# Altium PCB PCB1.pcbdoc
Units mil, origin at the board's own origin, x right, y up, seen from the top; angles counter-clockwise.
Board outline 4745.27 x 1986.06 mil, 2 copper layers (Top Layer, Bottom Layer); 34 components, 46 nets, 162 pads, 58 vias.
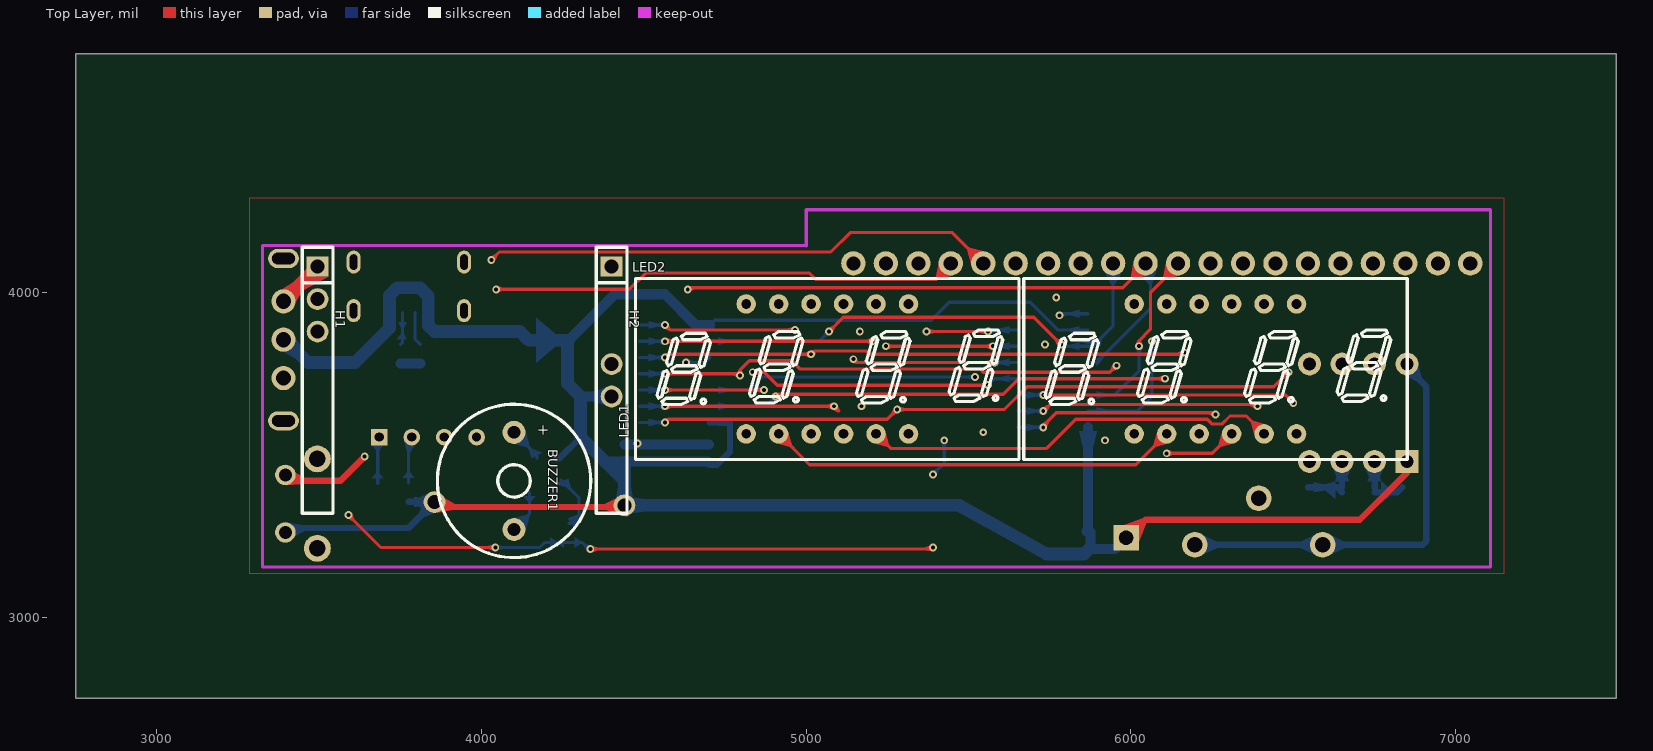
[diagram p0: Top Layer view]
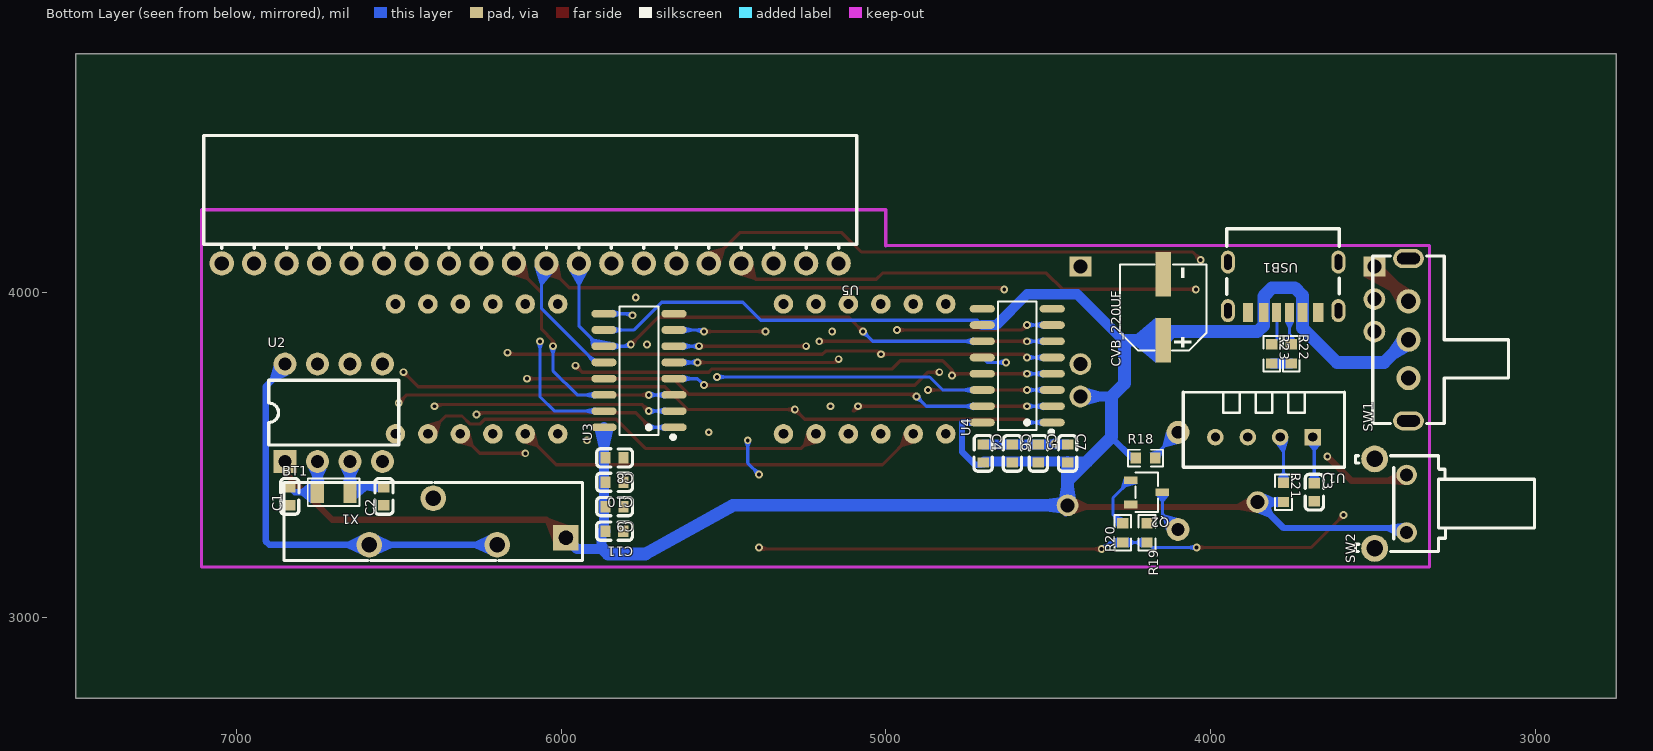
[diagram p1: Bottom Layer view, seen from below]

## Layer stack, top to bottom
Top Layer: signal copper (thickness not stored)
Dielectric: dielectric 12.6, FR-4, Dk 4.8
Bottom Layer: signal copper (thickness not stored)

## Board outline
7495.27,2750 2750,2750 2750,4736.06 7495.27,4736.06

## Components (designator, comment, footprint, x,y, rotation, side; value= is the part's Value field where it differs from the comment)
BT1 "BS-05-A1BJ001" BAT-TH_BS-05-A1BJ001 6393.81,3295 r180 bottom
BUZZER1 "FMB12A24" BUZ-TH_BD12.0-P7.60-D0.6-FD 4100.27,3420 r270 top
C1 "CL10C200JB8NNNC" C0603 6835.52,3372.69 r90 bottom
C2 "CL10C200JB8NNNC" C0603 6545.52,3372.69 r90 bottom
C3 "CL10B104KB8NNNC" C0603 3680.27,3385 r270 bottom
C4 "CL10B104KB8NNNC" C0603 4700.27,3504.39 r270 bottom
C5 "CL10B104KB8NNNC" C0603 4530.27,3504.39 r270 bottom
C6 "CL10A106MA8NRNC" C0603 4610.27,3504.39 r270 bottom
C7 "CL10A106MA8NRNC" C0603 4440.27,3504.39 r270 bottom
C8 "CL10B104KB8NNNC" C0603 5835.61,3490.98 r0 bottom
C9 "CL10B104KB8NNNC" C0603 5835.61,3340.98 r0 bottom
C10 "CL10A106MA8NRNC" C0603 5835.61,3415.98 r0 bottom
C11 "CL10A106MA8NRNC" C0603 5835.88,3265.21 r0 bottom
CVB_220UF "RX220UF16V90RV0106" CAP-SMD_BD6.3-L6.6-W6.6-FD-2 4145.27,3955 r90 bottom
H1 "PM2.54-1*8" HDR-TH_8P-P2.54-V-F#1 3495.27,3730 r270 top
H2 "PM2.54-1*8" HDR-TH_8P-P2.54-V-F#2 4400.78,3730 r270 top
LED1 "FJ3461AH" LED-SEG-TH_12P-L30.0-W14.0-P2.54-S10.16-BL 6260.27,3765 r0 top
LED2 "FJ3461AH" LED-SEG-TH_12P-L30.0-W14.0-P2.54-S10.16-BL 5065.27,3765 r0 top
Q2 "SS8050_C177739" SOT-23-3_L2.9-W1.6-P1.90-LS2.8-BR 4196.89,3385 r0 bottom
R18 "RTT03100JTP" R0603 4200.27,3490 r180 bottom
R19 "0603WAF1002T5E" R0603 4195.27,3260 r90 bottom
R20 "0603WAF4701T5E" R0603 4270.27,3260 r90 bottom
R21 "ERJ3GEYJ472V" R0603 3775.27,3385 r270 bottom
R22 "0603WAF5101T5E" R0603 3751.43,3811.16 r270 bottom
R23 "0603WAF5101T5E" R0603 3811.43,3811.16 r270 bottom
SW1 "SK12F14G5" SW-TH_SK12F14G5 3390.27,3855 r90 bottom
SW2 "KH-6X6X10H-ZJ" SW-TH_KH-6X6X10H-ZJ 3445.27,3350 r90 bottom
U1 "DHT11" SENSOR-TH_DHT11 3835.27,3555 r0 bottom
U2 "DS1302N" DIP-8_L9.7-W6.4-P2.54-LS7.6-BL 6700.27,3630 r180 bottom
U3 "SN74HC595DR" SOIC-16_L9.9-W3.9-P1.27-LS6.0-BL 5760.27,3760 r90 bottom
U4 "SN74HC595DR" SOIC-16_L9.9-W3.9-P1.27-LS6.0-BL 4595.27,3775 r90 bottom
U5 "PM254-1-20-W-8.5" HDR-TH_20P-P2.54-H-F-W10.0-N 6095.27,4090 r0 bottom
USB1 "TYPE-C-31-M-17" USB-C-SMD_10P-P1.00-L6.8-W8.9 3776.43,4016.16 r0 bottom
X1 "FC-135 32.7680KA-A" OSC-SMD_L3.2-W1.5 6700.52,3385.25 r0 bottom

## Footprints (in the part's own frame and the unit in brackets; to place one, negate y for a bottom-side part, rotate by r counter-clockwise, add the part's x,y. Pads: shape width x height; smd on the part's side, far side on the other; paste and mask are expansions set on the pad)
BAT-TH_BS-05-A1BJ001 [mm]
  round 2 hole 1.2: 1(-5,-1.825) 1(5,-1.825) 2(0,1.825)
  silkscreen extent -11.68,-3.05 11.68,3.05
BUZ-TH_BD12.0-P7.60-D0.6-FD [mm]
  round 1.8 hole 1: 1(-3.8,0) 2(3.8,0)
  silkscreen extent -6,-6 6,6
C0603 [mm]
  rect 0.8x0.9 smd: 1(-0.7,0) 2(0.7,0)
  silkscreen extent -1.41,-0.71 1.39,0.72
CAP-SMD_BD6.3-L6.6-W6.6-FD-2 [mm]
  rect 3.5x1.2 smd: 1(-2.58,0) 2(2.58,0)
  silkscreen extent -3.4,-3.38 3.36,3.38
DIP-8_L9.7-W6.4-P2.54-LS7.6-BL [mm]
  rect 1.8x1.8 hole 1: 1(-3.81,-3.81)
  round 1.8 hole 1: 2(-1.27,-3.81) 3(1.27,-3.81) 4(3.81,-3.81) 5(3.81,3.81) 6(1.27,3.81) 7(-1.27,3.81) 8(-3.81,3.81)
  silkscreen extent -5.08,-2.53 5.08,2.53
HDR-TH_8P-P2.54-V-F#1 [mm]
  rect 1.575x1.7 hole 1.1: 1(-8.89,0)
  round 1.7 hole 1.1: 2(-6.35,0) 3(-3.81,0)
  silkscreen extent -10.4,-1.2 10.4,1.2
HDR-TH_8P-P2.54-V-F#2 [mm]
  rect 1.575x1.7 hole 1.1: 1(-8.89,0)
  round 1.7 hole 1.1: 4(-1.27,0) 5(1.27,0)
  silkscreen extent -10.4,-1.2 10.4,1.2
HDR-TH_20P-P2.54-H-F-W10.0-N [mm]
  round 1.9 hole 1.1: 1(-24.13,0) 2(-21.59,0) 3(-19.05,0) 4(-16.51,0) 5(-13.97,0) 6(-11.43,0) 7(-8.89,0) 8(-6.35,0) 9(-3.81,0) 10(-1.27,0) 11(1.27,0) 12(3.81,0) 13(6.35,0) 14(8.89,0) 15(11.43,0) 16(13.97,0) 17(16.51,0) 18(19.05,0) 19(21.59,0) 20(24.13,0)
  silkscreen extent -25.54,-10 25.54,-1.18
LED-SEG-TH_12P-L30.0-W14.0-P2.54-S10.16-BL [mil]
  round 60 hole 30: 1(-250,-200) 2(-150,-200) 3(-50,-200) 4(50,-200) 5(150,-200) 6(250,-200) 7(250,200) 8(150,200) 9(50,200) 10(-50,200) 11(-150,200) 12(-250,200)
  silkscreen extent -591,-279 591,279
OSC-SMD_L3.2-W1.5 [mm]
  rect 1.05x1.7 smd: 1(-1.275,0) 2(1.275,0)
  silkscreen extent -2.03,-1.08 2.03,1.08
R0603 [mil]
  rect 31.75x34.02 smd: 1(-29.66,0) 2(29.66,0)
  silkscreen extent -55,-26 55,26
SENSOR-TH_DHT11 [mil]
  rect 51x51 hole 28: 1(-150,0)
  round 51 hole 28: 2(-50,0) 3(50,0) 4(150,0)
  silkscreen extent -248,-138 248,93
SOIC-16_L9.9-W3.9-P1.27-LS6.0-BL [mil]
  oval 23.7x77.6 smd: 1(-175,-107.7) 2(-125,-107.7) 3(-75,-107.7) 4(-25,-107.7) 5(25,-107.7) 6(75,-107.7) 7(125,-107.7) 8(175,-107.7) 9(175,107.7) 10(125,107.7) 11(75,107.7) 12(25,107.7) 13(-25,107.7) 14(-75,107.7) 15(-125,107.7) 16(-175,107.7)
  silkscreen extent -211,-111 198,60
SOT-23-3_L2.9-W1.6-P1.90-LS2.8-BR [mm]
  rect 1.07x0.6 smd: 1(1.235,-0.95) 2(1.235,0.95) 3(-1.235,0)
  silkscreen extent -0.88,-1.54 0.88,1.54
SW-TH_KH-6X6X10H-ZJ [mm]
  round 1.6 hole 1: 1(-2.25,-1.25) 2(2.25,-1.25)
  round 2.1 hole 1.3 copper offset 0,0: 3(-3.5,1.25) 4(3.5,1.25)
  silkscreen extent -3.75,-11.25 3.75,2.75
SW-TH_SK12F14G5 [mm]
  round 1.9 hole 1.2: 1(-3,0) 2(0,0) 3(3,0)
  oval 1.5x2.4 hole 0.9 slot 1.8 at 90 deg: 4(6.35,0) 5(-6.35,0)
  silkscreen extent -6.55,-7.82 6.55,2.8
USB-C-SMD_10P-P1.00-L6.8-W8.9 [mm]
  oval 1.1x1.8 hole 0.6 slot 1.2 at 90 deg: 0(-4.32,-1.975) 0(-4.32,1.825) 0(4.32,-1.975) 0(4.32,1.825)
  rect 0.8x1.5 smd: 1(-2.75,1.975) 6(2.75,1.975)
  rect 0.76x1.5 smd: 2(-1.52,1.975) 5(1.52,1.975)
  rect 0.7x1.5 smd: 3(-0.5,1.975) 4(0.5,1.975)
  silkscreen extent -4.41,-4.58 4.41,0.56

## Free pads (board coordinates)
  round 66.93 hole 43.31: 4(3855.27,3355) 4(4440.27,3345)
  rect 78.74x78.74 hole 43.31 slot 43.81 at 0 deg: 4(5985.27,3245)

## Via types
v1: diameter 24.02, hole 12.01, Top Layer to Bottom Layer, 58 vias

## Nets (pads, with @x,y where several pads share a name; then routed paths per layer and width w, separated by ;. In a path a pad name is that pad's centre, name@x,y a point inside that pad or via, vN(x,y) a via of type N, cw(c..) or ccw(c..) an arc to the next point about the centre after c; other vN are vias at no path point)
3V3: H2.1 U5.18 | length 2499.2
  Inner2 w10: H2.1 4925.27,4080 4980.27,4025 6785.27,4025 U5.18@6850.27,4090
5V: H1.1 SW1.3 | length 150.4
  Top Layer w39.37: SW1.3 3390.27,3975 H1.1
$1N1104: BUZZER1.1 R18.2 | length 108.7
  Bottom Layer w10: BUZZER1.1 4170.61,3499.26 R18.2
$1N1105: Q2.1 R20.2 | length 170.6
  Bottom Layer w10: Q2.1 4300.27,3367.64 4300.27,3315 4274.93,3289.66 R20.2
$1N1107: BUZZER1.2 Q2.3 | length 134.5
  Bottom Layer w10: BUZZER1.2 4148.26,3318.38 Q2.3
$1N1509: U5.13
$1N2058: C1.2 U2.2 X1.2 | length 171.8
  Bottom Layer w19.68: U2.2 6750.72,3479.55 X1.2@6750.72,3399.35 ; X1.2 6820.52,3385.25 C1.2
$1N2064: C2.2 U2.3 X1.1 | length 190.8
  Bottom Layer w19.68: C2.2 6635.32,3400.25 X1.1 ; X1.1@6650.27,3400.2 U2.3
$1N3028: C3.1 U1.1 | length 144.5
  Bottom Layer w10: C3.1 3680.27,3550 U1.1
$1N5258: U3.9 U4.14 | length 1269.4
  Inner1 w10: v1(5520.27,3740) 5590.27,3740 v1(5780.27,3930)
  Bottom Layer w10: U4.14 4825.27,3700 4865.27,3740 v1(5520.27,3740) v1@5525.27,3735 ; v1(5780.27,3930) 5785.27,3935 U3.9
$1N8704: R22.1 USB1.3 | length 99.8
  Bottom Layer w10: R22.1 3756.73,3846.12 USB1.3
$1N8705: R23.1 USB1.4 | length 104.6
  Bottom Layer w10: USB1.4 3795.27,3937.55 3795.27,3856.98 R23.1
A0: LED1.12 U3.15 | length 523.7
  Inner1 w10: LED1.12 6010.27,3905 v1(6065.27,3850)
  Bottom Layer w10: U3.15 6020.27,3635 6065.27,3680 v1(6065.27,3850)
A1: LED1.9 U3.1 | length 992.1
  Top Layer w10: v1(5730.27,3585) 5730.27,3590 5770.27,3630 6255.27,3630 v1(6260.27,3625)
  Inner1 w10: v1(6260.27,3625) 6260.27,3915 LED1.9
  Bottom Layer w10: U3.1 v1(5730.27,3585)
A2: LED1.8 U3.2 | length 1071.3
  Top Layer w10: v1(5730.27,3635) 5750.27,3655 6385.27,3655 v1(6390.27,3650)
  Inner1 w10: v1(6390.27,3650) 6410.27,3670 LED1.8
  Bottom Layer w10: U3.2 v1(5730.27,3635)
A3: LED1.6 U3.3 | length 957.2
  Top Layer w10: v1(5730.27,3685) 6475.27,3685 v1(6500.27,3660)
  Inner1 w10: v1(6500.27,3660) 6510.27,3650 LED1.6
  Bottom Layer w10: U3.3 v1(5730.27,3685)
A4: LED2.12 U3.4 | length 1041.3
  Top Layer w10: v1@4840.27,3755 4870.27,3755 4910.27,3715 v1(5560.27,3715)
  Inner1 w10: LED2.12 4835.27,3945 v1(4835.27,3755)
  Bottom Layer w10: 5570.27,3725 5580.27,3735 U3.4
A5: LED2.9 U3.5 | length 693.9
  Top Layer w10: v1(5145.27,3795) 5155.27,3785 v1(5580.27,3785)
  Inner1 w10: LED2.9 5115.27,3825 v1(5145.27,3795)
  Bottom Layer w10: v1(5580.27,3785) U3.5
A6: LED2.8 U3.6 | length 549.7
  Top Layer w10: v1(5245.27,3835) v1(5575.27,3835)
  Inner1 w10: LED2.8 5245.27,3935 v1(5245.27,3835)
  Bottom Layer w10: v1(5575.27,3835) U3.6
A7: LED2.6 U3.7 | length 622.2
  Top Layer w10: v1(5370.27,3880) v1(5560.27,3880)
  Inner1 w10: LED2.6 5370.27,3620 v1(5370.27,3880)
  Bottom Layer w10: v1(5560.27,3880) 5565.27,3885 U3.7
B0: LED1.11 LED2.11 U4.15 | length 1958.7
  Top Layer w10: v1(4905.27,3680) 4912.28,3687.01 5607.28,3687.01 5655.27,3735 v1(6105.27,3735)
  Inner1 w10: v1(4905.27,3680) 4915.27,3690 LED2.11 ; v1(6105.27,3735) 6110.27,3740 LED1.11
  Bottom Layer w10: U4.15 4875.27,3650 v1(4905.27,3680)
B1: LED1.7 LED2.7 U4.1 | length 2621.8
  Top Layer w10: v1(4565.27,3600) 4575.27,3610 5250.27,3610 v1(5280.27,3640) 5610.27,3640 5680.27,3710 6440.27,3710 v1(6485.27,3755)
  Inner1 w10: v1(5280.27,3640) 5280.27,3930 LED2.7 ; v1(6485.27,3755) 6485.27,3845 6510.27,3870 LED1.7
  Bottom Layer w10: U4.1 v1(4565.27,3600)
B2: LED1.4 LED2.4 U4.2 | length 1961
  Top Layer w10: v1(4565.27,3650) v1(5085.27,3650) 5100.27,3635 ; v1(6110.27,3505) 6250.27,3505 LED1.4
  Inner1 w10: v1(5085.27,3650) 5115.27,3620 LED2.4 5175.27,3505 v1(6110.27,3505)
  Bottom Layer w10: U4.2 v1(4565.27,3650)
B3: LED1.2 LED2.2 U4.3 | length 1817.1
  Top Layer w10: v1(4565.27,3700) v1(4870.27,3700) v1@4875.27,3695 ; LED2.2 5010.27,3470 6015.27,3470 LED1.2
  Inner1 w10: v1(4870.27,3700) 4870.27,3610 LED2.2
  Bottom Layer w10: U4.3 v1(4565.27,3700)
B4: LED1.1 LED2.1 U4.4 | length 1954.7
  Top Layer w10: v1(4565.27,3750) 4790.27,3750 v1(4795.89,3744.38) ; v1@4800.27,3740 v1(4795.89,3744.38) ; v1(5955.27,3775) 5935.27,3755 5545.27,3755 5535.27,3765 4980.27,3765 4955.27,3790 4825.27,3790 4795.89,3760.62 v1(4795.89,3744.38)
  Inner1 w10: v1(4795.89,3744.38) 4795.89,3584.38 LED2.1 ; v1(5955.27,3775) 6010.27,3720 LED1.1
  Bottom Layer w10: U4.4 v1(4565.27,3750) v1@4570.27,3755
B5: LED1.10 LED2.10 U4.5 | length 2015.8
  Top Layer w10: v1(4565.27,3800) 4575.27,3810 v1(5015.27,3810) 5025.27,3820 5185.27,3820 5195.27,3810 6160.27,3810 v1(6165.27,3815)
  Inner1 w10: v1(5015.27,3810) LED2.10 ; v1(6165.27,3815) 6210.27,3860 LED1.10
  Bottom Layer w10: U4.5 v1(4565.27,3800)
B6: LED1.5 LED2.5 U4.6 | length 2302.3
  Top Layer w10: v1(4565.27,3850) v1@5210.27,3850 ; LED2.5 5260.27,3520 5740.27,3520 5830.27,3610 6235.27,3610 6250.27,3595 6280.27,3595 6305.27,3620 6355.27,3620 LED1.5
  Inner1 w10: v1(5204.92,3850) 5215.27,3839.65 LED2.5
  Bottom Layer w10: U4.6 v1(4565.27,3850)
B7: LED1.3 LED2.3 U4.7 | length 2111.8
  Top Layer w10: v1(4565.27,3900) 4580.27,3885 v1(4965.27,3885)
  Inner1 w10: v1(4965.27,3885) 4965.27,3615 LED2.3 5015.27,3535 5075.27,3475 6120.27,3475 LED1.3
  Bottom Layer w10: U4.7 v1(4565.27,3900)
BEEP: H1.3 R19.1 R20.1 U5.3 | length 3381.1
  Top Layer w10: v1(3590.27,3315) 3690.27,3215 v1(4042.58,3215) ; v1(4335.27,3210) 5385.27,3210 v1(5390.27,3215)
  Inner1 w10: U5.3@5350.27,4090 5425.27,4015 v1(5425.27,3545) ; v1(5390.27,3215) v1(5390.27,3440)
  Inner1 w19.68: H1.3 3500.27,3880 3575.27,3805 3575.27,3330 v1(3590.27,3315)
  Bottom Layer w10: v1(4042.58,3215) 4179.93,3215 R19.1 R20.1 4309.93,3230.34 v1@4330.27,3210 ; v1(5390.27,3440) 5425.27,3475 v1(5425.27,3545)
DIO: U3.14 U5.11 | length 570.1
  Top Layer w10: v1(6025.27,3835) 6025.27,3852.01 6060.27,3887.01 6060.27,4000 U5.11@6150.27,4090
  Bottom Layer w10: U3.14 5950.27,3685 6025.27,3760 v1(6025.27,3835)
GND: BT1.2 C1.1 C2.1 C3.2 C4.1 C5.1 C6.1 C7.1 C8.1 C9.1 C10.1 C11.1 CVB_220UF.2 H1.2 H2.4 Q2.2 R19.2 R22.2 R23.2 U1.4 U2.4 U3.8 U3.13 U4.8 U4.13 U5.19 U5.20 USB1.1 USB1.6 | length 326.8
  Bottom Layer w10: C5.1@4527.22,3535 C5.1
  Bottom Layer w31.5: R22.2 R23.2 ; C7.1 4477.22,3531.95 v1(4480.27,3535) 4483.32,3531.95 C5.1 C6.1 C4.1
  other v1: 5920.27,3545 5545.27,3570 5170.27,3650 5735.27,3840 5165.27,3880 5770.27,3985
IO: U2.6 U5.16 | length 310
  Inner1 w10: U2.6 U5.16@6650.27,4090
KEY1: U5.12
KEY2: SW2.2 U5.5 | length 2685.9
  Top Layer w10: v1(4030.27,4100) 4055.27,4125 5075.27,4125 5135.27,4185 5450.27,4185 U5.5
  Top Layer w19.68: SW2.2 3414.64,3420 3565.27,3420 v1(3640.27,3495)
  Inner1 w10: v1(3640.27,3495) 3645.27,3500 3645.27,3755 3900.27,4010 3980.27,4010 4030.27,4060 v1(4030.27,4100)
KEY3: U5.14
PC13: U5.2
QH: U4.9
RCLK: U3.12 U4.12 U5.10 | length 2158.9
  Top Layer w10: v1(4635.27,4010) 4640.27,4015 5975.27,4015 U5.10@6050.27,4090
  Inner1 w10: v1(4630.27,3785) 4630.27,4005 v1(4635.27,4010)
  Bottom Layer w10: v1(4630.27,3785) 4687.97,3785 U4.12 ; U3.12 5895.27,3785 6060.27,3950 6060.27,4080 U5.10@6050.27,4090
RST: U2.5 U5.15 | length 369.7
  Inner1 w10: U2.5@6530.27,3770 6600.27,3840 6600.27,4040 U5.15@6550.27,4090
SCLK: U3.11 U4.11 U5.9 | length 1529.9
  Top Layer w10: v1(5070.27,3880) 5114.27,3924 5701.27,3924 v1(5785.27,3840)
  Bottom Layer w10: U4.11 5040.27,3850 v1(5070.27,3880) ; v1(5785.27,3840) 5790.27,3835 U3.11 5882.11,3835 5945.27,3898.16 5945.27,4085 U5.9@5950.27,4090
SCLKT: U2.7 U5.17 | length 314.1
  Inner1 w10: U2.7 6745.27,3785 6745.27,4085 U5.17@6750.27,4090
TEM: R21.1 U1.2 U5.4 | length 2161.4
  Top Layer w10: v1(4045.27,4010) 4455.27,4010 4505.27,4060 5010.27,4060 5029.27,4041 5401.27,4041 U5.4@5450.27,4090
  Inner1 w10: U1.2 4045.27,3815 v1(4045.27,4010)
  Bottom Layer w10: R21.1@3775.27,3414.32 3775.27,3545 U1.2
VBAT: U5.1
VCC: C4.2 C5.2 C6.2 C7.2 C8.2 C9.2 C10.2 C11.2 CVB_220UF.1 H2.5 pad.4 R18.1 R21.2 SW1.2 SW2.1 U2.1 U3.10 U3.16 U4.10 U4.16 USB1.2 USB1.5 | length 8476.8
  Top Layer w19.68: pad.4@3860.27,3345 3865.59,3339.68 4425.59,3339.68 pad.4@4445.27,3320 ; pad.4@5995.27,3250 6045.27,3300 6705.27,3300 6850.27,3445 U2.1
  Bottom Layer w10: U4.10 4717.97,3915 5385.27,3915 5440.27,3970 5690.27,3970 5775.27,3885 U3.10
  Bottom Layer w19.68: SW2.1 3409.65,3275 3775.27,3275 pad.4@3855.27,3355 ; R21.2 pad.4@3849.93,3355.34 ; R18.1 4240.27,3490 4305.27,3555 ; pad.4@4440.27,3345 4440.27,3325 pad.4@4445.27,3320 ; U4.16 4765.27,3600 4765.27,3510 4725.27,3470 C4.2@4707.1,3470
  Bottom Layer w31.5: 4268.7,3853.43 4410.27,3995 4565.27,3995 4660.27,3900 U4.10 ; 4305.27,3680 H2.5 ; 4380.27,3480 4697.1,3480 C4.2 ; C11.2 C11.2@5867.97,3269.74 ; U3.16 C11.2@5867.97,3269.74 ; pad.4@5985.27,3245 5950.27,3210 5880.27,3210 5875.27,3215 5875.27,3262.44 C11.2@5867.97,3269.74
  Bottom Layer w39.37: SW1.2@3395.27,3855 3465.27,3785 3610.45,3785 3716.58,3891.13 USB1.2 3716.58,3991.31 3740.27,4015 3810.27,4015 3836.28,3988.99 USB1.5 3836.28,3898.99 3855.27,3880 4118.7,3880 CVB_220UF.1 4268.7,3853.43 4265.27,3850 4265.27,3720 4305.27,3680 4305.27,3555 4380.27,3480 4440.27,3420 ; C7.2 4440.27,3420 ; 5875.27,3215 5855.27,3195 5740.27,3195 5470.27,3345 4440.27,3345 4440.27,3420
VCCL: BT1.1 U2.8 | length 1283.7
  Bottom Layer w19.68: BT1.1@6198.42,3223.15 6590.66,3223.15 6898.42,3223.15 6910.27,3235 6910.27,3710 U2.8@6845.27,3775
"": SW1.1 SW1.4 SW1.5 SW2.3 SW2.4 U1.3 U5.6 U5.7 U5.8 USB1.0

## Polygon pours and split planes (outlines as drawn)
GND on Top Layer (solid, remove dead copper, pour order 0): 3285.27,3135 7150.27,3135 7150.27,4290 3285.27,4290
GND on Bottom Layer (solid, remove dead copper, pour order 1): 3275.27,3135 7150.27,3135 7150.27,4290 3275.27,4290
GND on Inner1 (solid, remove dead copper, pour order 2): 3240.27,3100 7165.27,3100 7165.27,4195 3240.27,4195
GND on Inner2 (solid, remove dead copper, pour order 3): 3200.27,3000 7245.27,3000 7245.27,4255 3200.27,4255

## Keep-outs
Board Outline Layer:
  lines w10 net "": 3325.27,4144.25 3325.27,3155 7107.28,3155 7107.28,4144.25 7107.28,4255 5000.27,4255 5000.27,4144.25 ; 3325.27,4145 5000.27,4145

## Other copper
Top Layer:
  region net VCC: 4414.43,3366.26 4381.92,3349.53 4385.09,3329.84 4422.4,3316.7
  region net VCC: 3863.47,3322.55 3906.31,3329.84 3916.44,3349.53 3886.44,3367.19
  region net VCC: 6036.6,3305.25 5980.92,3284.37 6024.64,3230.65 6045.52,3286.33
  region net B6: 6412.15,3594.94 6377.75,3604.6 6370.67,3597.53 6380.33,3563.12
  region net B2: 6280.33,3566.88 6270.67,3532.47 6277.75,3525.4 6312.15,3535.06
  region net B3: 6080.33,3566.88 6070.67,3532.47 6077.75,3525.4 6112.15,3535.06
  region net B6: 5213.39,3535.06 5247.8,3525.4 5254.87,3532.47 5245.21,3566.88
  region net B3: 4913.39,3535.06 4947.8,3525.4 4954.87,3532.47 4945.21,3566.88
  region net 5V: 3450.35,4007.24 3528.74,4049 3461.81,4049 3420.05,4032.62
  region net TEM: 5407.89,4088.8 5398.98,4045.78 5406.72,4039.38 5451.13,4053.06
  region net KEY2: 5547.61,4127.33 5503.85,4138.5 5496.78,4131.42 5507.94,4087.66
  region net RCLK: 6007.89,4088.8 5998.98,4045.78 6006.72,4039.38 6051.13,4053.06
  region net DIO: 6107.89,4088.8 6098.98,4045.78 6106.72,4039.38 6151.13,4053.06
  region net 5V: 3427.66,3972.1 3448.7,4005.59 3419.86,4032.43 3386.6,4010.33
  region net KEY2: 3398.95,3407.21 3441.61,3410.16 3455.99,3429.84 3426.82,3445.37
  region net B7: 4564.52,3888.02 4576.17,3882.03 4583.24,3889.1 4577.26,3900.75
  region net B7: 4957.33,3894.01 4944.86,3890 4944.86,3880 4957.33,3875.99
  region net B6: 4573.21,3840.99 4585.69,3845 4585.69,3855 4573.21,3859.01
  region net B5: 4577.26,3799.25 4578.81,3806.46 4571.74,3813.54 4564.52,3811.98
  region net B5: 5007.33,3819.01 4994.86,3815 4994.86,3805 5007.33,3800.99
  region net B5: 5027.26,3809.25 5028.81,3816.46 5021.74,3823.54 5014.52,3821.98
  region net B4: 4573.21,3740.99 4585.69,3745 4585.69,3755 4573.21,3759.01
  region net B3: 4573.21,3690.99 4585.69,3695 4585.69,3705 4573.21,3709.01
  region net B2: 4573.21,3640.99 4585.69,3645 4585.69,3655 4573.21,3659.01
  region net B1: 4577.26,3599.25 4578.81,3606.46 4571.74,3613.54 4564.52,3611.98
  region net B4: 4793.09,3756.05 4778.42,3755 4773.12,3745 4784.66,3740.14
  region net B4: 4804.9,3752.32 4800.89,3760.62 4790.89,3760.62 4786.89,3752.32
  region net B3: 4862.33,3709.01 4849.86,3705 4849.86,3695 4862.33,3690.99
  region net B2: 5084.52,3638.02 5096.17,3632.03 5103.24,3639.1 5097.26,3650.75
  region net B2: 5077.33,3659.01 5064.86,3655 5064.86,3645 5077.33,3640.99
  region net B1: 5268.29,3640.75 5262.3,3629.1 5269.37,3622.03 5281.02,3628.02
  region net B1: 5288.21,3630.99 5300.69,3635 5300.69,3645 5288.21,3649.01
  region net B6: 5196.98,3859.01 5184.5,3855 5184.5,3845 5196.98,3840.99
  region net B0: 4916.98,3677.32 4928.97,3682.01 4921.78,3692.01 4906.47,3691.95
  region net A7: 5552.33,3889.01 5539.86,3885 5539.86,3875 5552.33,3870.99
  region net A7: 5378.21,3870.99 5390.69,3875 5390.69,3885 5378.21,3889.01
  region net A6: 5567.33,3844.01 5554.86,3840 5554.86,3830 5567.33,3825.99
  region net A6: 5253.21,3825.99 5265.69,3830 5265.69,3840 5253.21,3844.01
  region net A5: 5572.33,3794.01 5559.86,3790 5559.86,3780 5572.33,3775.99
  region net A5: 5144.52,3783.02 5151.74,3781.46 5158.81,3788.54 5157.26,3795.75
  region net A4: 5552.33,3724.01 5539.86,3720 5539.86,3710 5552.33,3705.99
  region net A4: 4843.21,3745.99 4855.69,3750 4855.69,3760 4843.21,3764.01
  region net A3: 5738.21,3675.99 5750.69,3680 5750.69,3690 5738.21,3694.01
  region net A3: 6501.02,3671.98 6489.37,3677.97 6482.3,3670.9 6488.29,3659.25
  region net A2: 5742.26,3634.25 5748.24,3645.9 5741.17,3652.97 5729.52,3646.98
  region net A2: 6386.8,3661.5 6372.4,3660 6367.82,3650 6379.3,3645.12
  region net A1: 5741.95,3587.81 5746.73,3599.39 5737.48,3604.28 5726.02,3596.23
  region net A1: 6256.8,3636.5 6242.4,3635 6237.82,3625 6249.3,3620.12
  region net B0: 6097.33,3744.01 6084.86,3740 6084.86,3730 6097.33,3725.99
  region net B5: 6154.3,3819.88 6142.82,3815 6147.4,3805 6161.8,3803.5
  region net B1: 6473.29,3755.75 6467.3,3744.1 6474.37,3737.03 6486.02,3743.02
  region net B4: 5943.29,3775.75 5937.3,3764.1 5944.37,3757.03 5956.02,3763.02
  region net B2: 6118.21,3495.99 6130.69,3500 6130.69,3510 6118.21,3514.01
  region net DIO: 6034.28,3842.94 6030.27,3852.01 6020.27,3852.01 6016.27,3842.94
  region net SCLK: 5082.26,3879.25 5088.24,3890.9 5081.17,3897.97 5069.52,3891.98
  region net SCLK: 5786.02,3851.98 5774.37,3857.97 5767.3,3850.9 5773.29,3839.25
  region net RCLK: 4646.24,4005.12 4657.72,4010 4653.14,4020 4638.74,4021.5
  region net BEEP: 3589.52,3303.02 3601.17,3297.03 3608.24,3304.1 3602.26,3315.75
  region net BEEP: 4034.64,3224.01 4022.17,3220 4022.17,3210 4034.64,3205.99
  region net BEEP: 4343.21,3200.99 4355.69,3205 4355.69,3215 4343.21,3219.01
  region net BEEP: 5379.3,3219.88 5367.82,3215 5372.4,3205 5386.8,3203.5
  region net TEM: 4053.21,4000.99 4065.69,4005 4065.69,4015 4053.21,4019.01
  region net KEY2: 4042.26,4099.25 4048.24,4110.9 4041.17,4117.97 4029.52,4111.98
Inner1:
  region net TEM: 3810.72,3553.4 3819.46,3582.12 3812.39,3589.19 3783.68,3580.45
  region net RST: 6585.37,3784.88 6591.98,3824.63 6583.47,3830.26 6541.04,3814.21
  region net IO: 6676.85,3803.44 6655.27,3840.24 6645.27,3840.24 6623.7,3803.44
  region net SCLKT: 6773.27,3806.95 6750.27,3840.84 6740.27,3839.42 6720.66,3799.45
  region net A0: 5987.77,3945.16 6005.27,3914 6015.27,3914 6032.77,3945.16
  region net B0: 6087.77,3945.16 6105.27,3914 6115.27,3914 6132.77,3945.16
  region net B5: 6187.77,3945.16 6205.27,3914 6215.27,3914 6232.77,3945.16
  region net A1: 6280.33,3966.88 6270.67,3932.47 6277.75,3925.4 6312.15,3935.06
  region net A2: 6387.77,3945.16 6405.27,3914 6415.27,3914 6432.77,3945.16
  region net B1: 6487.77,3945.16 6505.27,3914 6515.27,3914 6532.77,3945.16
  region net A3: 6532.77,3584.84 6515.27,3616 6505.27,3616 6487.77,3584.84
  region net B7: 6180.33,3566.88 6170.67,3532.47 6177.75,3525.4 6212.15,3535.06
  region net B4: 6032.77,3584.84 6015.27,3616 6005.27,3616 5987.77,3584.84
  region net A4: 4811.73,3935.21 4830.27,3909.99 4840.27,3918.94 4845.27,3965.21
  region net B0: 4892.77,3945.16 4910.27,3914 4920.27,3914 4937.77,3945.16
  region net B5: 4992.77,3945.16 5010.27,3914 5020.27,3914 5037.77,3945.16
  region net A5: 5092.77,3945.16 5110.27,3914 5120.27,3914 5137.77,3945.16
  region net A6: 5213.39,3935.06 5241.74,3931.46 5248.81,3938.54 5245.21,3966.88
  region net B1: 5285.33,3966.88 5276.74,3933.54 5283.81,3926.46 5317.15,3935.06
  region net A7: 5345.21,3563.12 5354.87,3597.53 5347.8,3604.6 5313.39,3594.94
  region net B6: 5237.77,3584.84 5220.27,3616 5210.27,3616 5192.77,3584.84
  region net B2: 5137.77,3584.84 5120.27,3616 5110.27,3616 5092.77,3584.84
  region net B2: 5113.39,3535.06 5147.8,3525.4 5154.87,3532.47 5145.21,3566.88
  region net B7: 5017.15,3594.94 4982.75,3604.6 4975.67,3597.53 4985.33,3563.12
  region net B7: 4992.77,3545.16 5029.2,3514 5043.34,3514 5037.77,3545.16
  region net B3: 4917.15,3594.94 4882.75,3604.6 4875.67,3597.53 4885.33,3563.12
  region net B4: 4819.63,3594.68 4800.89,3619.64 4790.89,3611.18 4785.28,3565.61
  region net BEEP: 3496.72,3846.57 3531.74,3834.61 3544.18,3850.01 3528.26,3885.61
  region net BEEP: 5346.47,4052.62 5389.5,4043.7 5395.9,4051.45 5382.21,4095.86
  region net RST: 6546.47,4052.62 6589.5,4043.7 6595.9,4051.45 6582.21,4095.86
  region net IO: 6620.78,4061.73 6645.27,4025.84 6655.27,4027.19 6676.38,4069.23
  region net SCLKT: 6717.22,4065.26 6740.27,4026.42 6750.27,4026.42 6773.32,4065.26
  region net B7: 4956.27,3877.06 4960.27,3864.59 4970.27,3864.59 4974.28,3877.06
  region net B5: 5024.28,3817.94 5020.27,3830.41 5010.27,3830.41 5006.27,3817.94
  region net B4: 4786.89,3736.44 4790.89,3723.96 4800.89,3723.96 4804.9,3736.44
  region net B3: 4861.27,3692.06 4865.27,3679.59 4875.27,3679.59 4879.28,3692.06
  region net B2: 5084.52,3638.02 5096.17,3632.03 5103.24,3639.1 5097.26,3650.75
  region net B1: 5289.28,3647.94 5285.27,3660.41 5275.27,3660.41 5271.27,3647.94
  region net B6: 5204.17,3838.02 5211.74,3836.11 5218.81,3843.18 5216.9,3850.75
  region net B0: 4917.26,3679.25 4918.81,3686.46 4911.74,3693.54 4904.52,3691.98
  region net $1N5258: 5528.21,3730.99 5540.69,3735 5540.69,3745 5528.21,3749.01
  region net $1N5258: 5768.29,3930.75 5762.3,3919.1 5769.37,3912.03 5781.02,3918.02
  region net A7: 5361.27,3872.06 5365.27,3859.59 5375.27,3859.59 5379.28,3872.06
  region net A6: 5254.28,3842.94 5250.27,3855.41 5240.27,3855.41 5236.27,3842.94
  region net A5: 5146.02,3806.98 5134.37,3812.97 5127.3,3805.9 5133.29,3794.25
  region net A4: 4844.28,3762.94 4840.27,3775.41 4830.27,3775.41 4826.27,3762.94
  region net A3: 6499.52,3648.02 6506.74,3646.46 6513.81,3653.54 6512.26,3660.75
  region net A2: 6402.26,3649.25 6408.24,3660.9 6401.17,3667.97 6389.52,3661.98
  region net A1: 6269.28,3632.94 6265.27,3645.41 6255.27,3645.41 6251.27,3632.94
  region net A0: 6066.02,3861.98 6054.37,3867.97 6047.3,3860.9 6053.29,3849.25
  region net B0: 6116.77,3738.47 6115.27,3752.87 6105.27,3757.45 6100.39,3745.97
  region net B5: 6177.26,3814.25 6183.24,3825.9 6176.17,3832.97 6164.52,3826.98
  region net B1: 6494.28,3762.94 6490.27,3775.41 6480.27,3775.41 6476.27,3762.94
  region net B4: 5954.52,3763.02 5966.17,3757.03 5973.24,3764.1 5967.26,3775.75
  region net B2: 6102.33,3514.01 6089.86,3510 6089.86,3500 6102.33,3495.99
  region net RCLK: 4639.28,3792.94 4635.27,3805.41 4625.27,3805.41 4621.27,3792.94
  region net RCLK: 4623.78,4006.53 4625.27,3992.13 4635.27,3987.55 4640.15,3999.03
  region net BEEP: 5399.28,3222.94 5395.27,3235.41 5385.27,3235.41 5381.27,3222.94
  region net BEEP: 5381.27,3432.06 5385.27,3419.59 5395.27,3419.59 5399.28,3432.06
  region net BEEP: 5434.28,3552.94 5430.27,3565.41 5420.27,3565.41 5416.27,3552.94
  region net TEM: 4036.27,4002.06 4040.27,3989.59 4050.27,3989.59 4054.28,4002.06
  region net KEY2: 4021.27,4092.06 4025.27,4079.59 4035.27,4079.59 4039.28,4092.06
  region net KEY2: 3651.77,3498.47 3650.27,3512.87 3640.27,3517.45 3635.39,3505.97
Inner2:
  region net 3V3: 4449.25,4075 4449.25,4085 4434.25,4097.5 4434.25,4062.5
  region net 3V3: 6807.89,4088.8 6798.98,4045.78 6806.72,4039.38 6851.13,4053.06
Bottom Layer:
  region net VCC: 4465.37,3367.13 4459.96,3401.89 4420.59,3401.89 4415.17,3367.13
  region net VCC: 4462.41,3319.9 4497.16,3325.32 4497.16,3364.69 4462.41,3370.1
  region net VCC: 3833.39,3380.32 3798.48,3365.18 3798.28,3345.5 3832.88,3330.13
  region net VCC: 3821.87,3357.1 3808.09,3321.73 3822,3307.81 3857.37,3321.6
  region net $1N3028: 3675.27,3514.5 3685.27,3514.5 3697.77,3529.5 3662.77,3529.5
  region net TEM: 3761.06,3546.98 3770.27,3514.27 3780.27,3510.01 3796.25,3531.98
  region net $1N2058: 6723.99,3456.23 6740.88,3419.64 6760.56,3419.89 6777.14,3456.9
  region net $1N2064: 6623.7,3456.56 6640.43,3419.76 6660.11,3419.76 6676.85,3456.56
  region net VCCL: 6841.04,3745.79 6879.34,3727.01 6896.1,3738.09 6885.37,3775.12
  region net $1N1107: 4135.64,3268.18 4146.4,3309.45 4139.33,3316.52 4098.05,3305.76
  region net $1N1104: 4098.05,3534.24 4139.33,3523.48 4146.4,3530.55 4135.64,3571.82
  region net $1N1104: 4159.33,3517.61 4145.19,3517.61 4154.74,3490.39 4186.49,3507.01
  region net BEEP: 4227.28,3235.34 4212.28,3246.22 4212.28,3214.46 4227.28,3225.34
  region net $1N1105: 4297.89,3305.54 4294.34,3316.14 4266.06,3305.54 4287.28,3273.78
  region net BEEP: 4302.28,3235.34 4287.28,3246.22 4287.28,3214.46 4302.28,3225.34
  region net BEEP: 4238.26,3235.34 4238.26,3225.34 4253.26,3214.46 4253.26,3246.22
  region net $1N1105: 4275,3399.98 4266.57,3426.09 4224.45,3410.59 4260.86,3399.98
  region net $1N1107: 4153.26,3358.19 4165.76,3373.19 4130.76,3373.19 4143.26,3358.19
  region net $1N2064: 6592.76,3410.09 6563.23,3415.99 6563.23,3384.5 6592.76,3390.4
  region net VCC: 3821.81,3365.18 3792.28,3371.22 3792.28,3339.46 3821.81,3345.5
  region net TEM: 3770.27,3445.54 3758.26,3430.54 3792.28,3430.54 3780.27,3445.54
  region net $1N3028: 3675.27,3443.31 3662.77,3428.31 3697.77,3428.31 3685.27,3443.31
  region net A1: 5705.26,3590 5679.52,3596.85 5679.52,3573.15 5705.26,3580
  region net A2: 5705.26,3640 5679.52,3646.85 5679.52,3623.15 5705.26,3630
  region net A3: 5705.26,3690 5679.52,3696.85 5679.52,3673.15 5705.26,3680
  region net A4: 5599.88,3730 5625.62,3723.15 5625.62,3746.85 5599.88,3740
  region net A5: 5599.88,3780 5625.62,3773.15 5625.62,3796.85 5599.88,3790
  region net A6: 5599.88,3830 5625.62,3823.15 5625.62,3846.85 5599.88,3840
  region net A7: 5599.88,3890 5599.88,3880 5625.62,3873.15 5625.62,3896.85
  region net VCC: 5852.22,3525.91 5883.72,3525.91 5894.92,3573.15 5841.02,3573.15
  region net A0: 5920.66,3630 5920.66,3640 5894.92,3646.85 5894.92,3623.15
  region net DIO: 5920.66,3680 5920.66,3690 5894.92,3696.85 5894.92,3673.15
  region net RCLK: 5909.84,3806.64 5894.92,3796.85 5894.92,3773.15 5916.75,3799.41
  region net SCLK: 5815.28,3830 5841.02,3823.15 5841.02,3846.85 5815.28,3840
  region net SCLK: 5897.5,3857.46 5841.02,3846.85 5906.77,3834.91 5910.53,3856.35
  region net VCC: 5815.28,3880 5841.02,3873.15 5841.02,3896.85 5815.28,3890
  region net $1N5258: 5815.28,3930 5841.02,3923.15 5841.02,3946.85 5815.28,3940
  region net B1: 4540.26,3605 4514.52,3611.85 4514.52,3588.15 4540.26,3595
  region net B2: 4540.26,3655 4514.52,3661.85 4514.52,3638.15 4540.26,3645
  region net B3: 4540.26,3705 4514.52,3711.85 4514.52,3688.15 4540.26,3695
  region net B4: 4540.26,3755 4514.52,3761.85 4514.52,3738.15 4540.26,3745
  region net B5: 4540.26,3795 4540.26,3805 4514.52,3811.85 4514.52,3788.15
  region net B6: 4540.26,3855 4514.52,3861.85 4514.52,3838.15 4540.26,3845
  region net B7: 4540.26,3905 4514.52,3911.85 4514.52,3888.15 4540.26,3895
  region net VCC: 4765.27,3609.84 4729.92,3611.85 4729.92,3588.15 4765.27,3590.16
  region net B0: 4755.66,3645 4755.66,3655 4729.92,3661.85 4729.92,3638.15
  region net $1N5258: 4755.66,3705 4729.92,3711.85 4729.92,3688.15 4755.66,3695
  region net SCLK: 4755.66,3845 4755.66,3855 4729.92,3861.85 4729.92,3838.15
  region net $1N8704: 3751.73,3893.88 3761.73,3893.88 3770.51,3908.88 3742.95,3908.88
  region net $1N8704: 3751.73,3871.7 3739.23,3856.7 3768.44,3856.7 3761.73,3871.7
  region net $1N2064: 6600.12,3410.09 6600.12,3390.4 6629.65,3365.8 6629.65,3418.71
  region net $1N2064: 6640.43,3448.24 6629.65,3418.71 6670.99,3418.71 6660.11,3448.24
  region net $1N2058: 6740.88,3448.24 6730.05,3418.71 6771.39,3418.71 6760.56,3448.24
  region net $1N2058: 6800.92,3375.4 6800.92,3395.09 6771.39,3418.71 6771.39,3351.78
  region net VCC: 4227.94,3873.12 4168.89,3922.33 4168.89,3784.53 4227.94,3833.75
  region net VCC: 4378.65,3705.1 4343.89,3695.75 4343.89,3664.25 4378.65,3654.9
  region net VCCL: 6564.62,3252.68 6523.73,3232.99 6523.73,3213.31 6564.62,3193.62
  region net VCCL: 6616.7,3193.62 6657.59,3213.31 6657.59,3232.99 6616.7,3252.68
  region net VCCL: 6223,3193.62 6263.89,3213.31 6263.89,3232.99 6223,3252.68
  region net SCLK: 5917.22,4065.26 5940.27,4026.42 5950.27,4026.42 5973.32,4065.26
  region net RCLK: 6029.5,4056.09 6055.27,4024.97 6065.27,4029.35 6080.89,4078.59
  region net VCC: 3391.47,3817.62 3425.1,3797.33 3450.29,3827.82 3427.21,3860.86
  region net VCC: 3425.05,3249.09 3453.62,3265.16 3444.21,3284.84 3404.67,3291.71
  region net B7: 4557.33,3909.01 4544.86,3905 4544.86,3895 4557.33,3890.99
  region net B6: 4557.33,3859.01 4544.86,3855 4544.86,3845 4557.33,3840.99
  region net B5: 4557.33,3809.01 4544.86,3805 4544.86,3795 4557.33,3790.99
  region net B4: 4557.33,3759.01 4544.86,3755 4544.86,3745 4557.33,3740.99
  region net B3: 4557.33,3709.01 4544.86,3705 4544.86,3695 4557.33,3690.99
  region net B2: 4557.33,3659.01 4544.86,3655 4544.86,3645 4557.33,3640.99
  region net B1: 4557.33,3609.01 4544.86,3605 4544.86,3595 4557.33,3590.99
  region net B0: 4893.29,3680.75 4887.3,3669.1 4894.37,3662.03 4906.02,3668.02
  region net $1N5258: 5512.33,3749.01 5499.86,3745 5499.86,3735 5512.33,3730.99
  region net $1N5258: 5791.24,3925.12 5802.72,3930 5798.14,3940 5783.74,3941.5
  region net A7: 5571.24,3875.12 5582.72,3880 5578.14,3890 5563.74,3891.5
  region net A6: 5583.21,3825.99 5595.69,3830 5595.69,3840 5583.21,3844.01
  region net A5: 5588.21,3775.99 5600.69,3780 5600.69,3790 5588.21,3794.01
  region net A3: 5722.33,3694.01 5709.86,3690 5709.86,3680 5722.33,3675.99
  region net A2: 5722.33,3644.01 5709.86,3640 5709.86,3630 5722.33,3625.99
  region net A1: 5722.33,3594.01 5709.86,3590 5709.86,3580 5722.33,3575.99
  region net A0: 6056.27,3842.06 6060.27,3829.59 6070.27,3829.59 6074.28,3842.06
  region net DIO: 6016.27,3827.06 6020.27,3814.59 6030.27,3814.59 6034.28,3827.06
  region net SCLK: 5058.29,3880.75 5052.3,3869.1 5059.37,3862.03 5071.02,3868.02
  region net SCLK: 5788.74,3828.5 5803.14,3830 5807.72,3840 5796.24,3844.88
  region net RCLK: 4638.21,3775.99 4650.69,3780 4650.69,3790 4638.21,3794.01
  region net BEEP: 4050.53,3205.99 4063,3210 4063,3220 4050.53,3224.01
  region net BEEP: 4332.46,3221.67 4320.88,3226.46 4315.99,3217.21 4324.04,3205.75
  region net BEEP: 5402.26,3439.25 5408.24,3450.9 5401.17,3457.97 5389.52,3451.98
  region net BEEP: 5416.27,3537.06 5420.27,3524.59 5430.27,3524.59 5434.28,3537.06

## Text inside footprints (layer, text, board x,y; h text height)
BUZZER1: Top Silkscreen Layer "+" at 4176.78,3594.99 h32.69 r270